# Altium PCB Forehead Module.PcbDoc
Units mm, origin at the board's own origin, x right, y up, seen from the top; angles counter-clockwise.
Board outline 29.5 x 16 mm, 2 copper layers (Top Layer, Bottom Layer), stack 1.671 mm thick; 7 components, 8 nets, 27 pads, 14 vias.
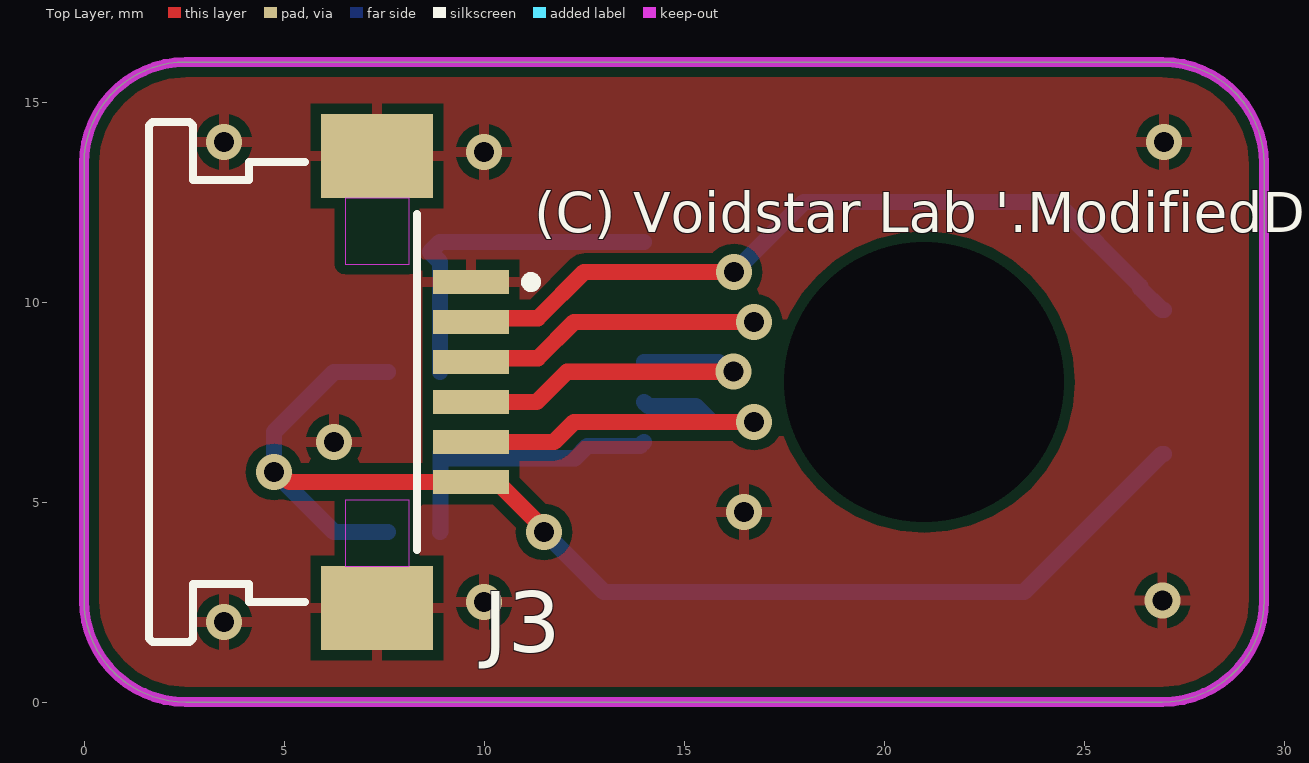
[diagram p0: Top Layer view]
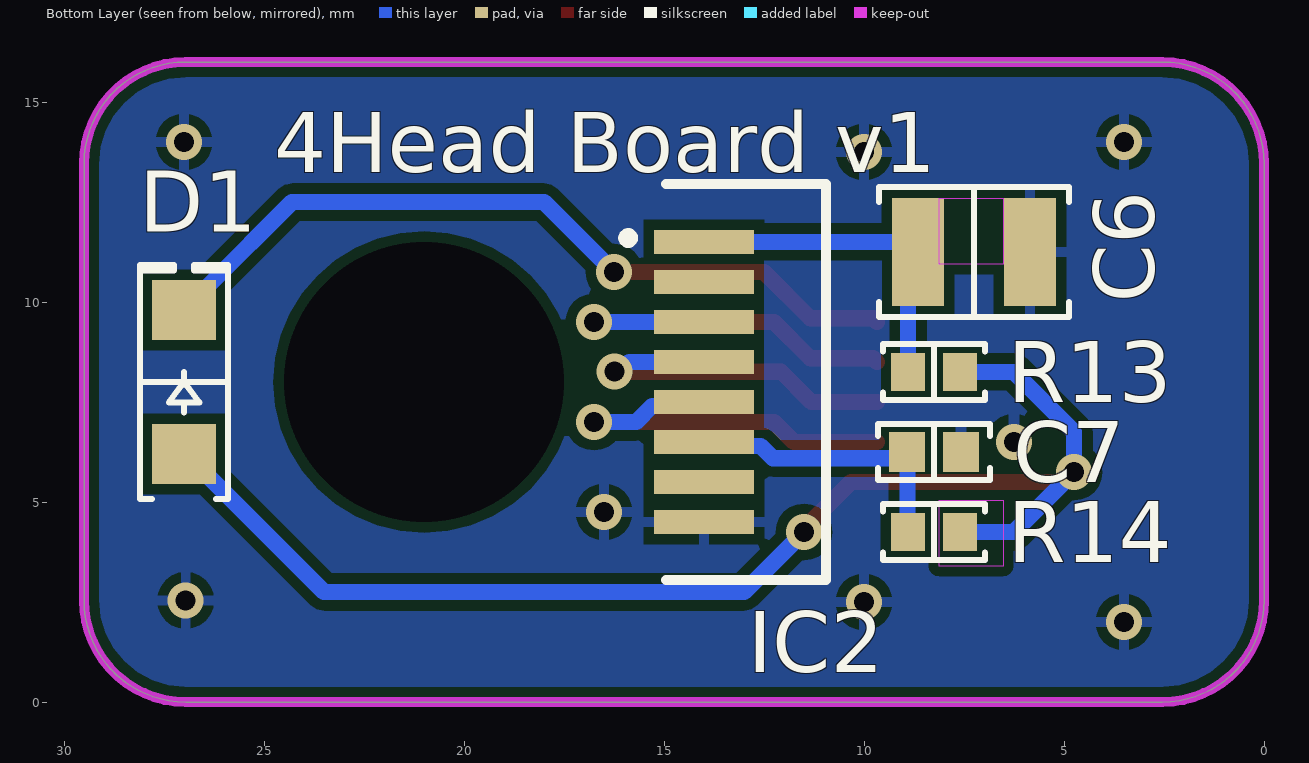
[diagram p1: Bottom Layer view, seen from below]
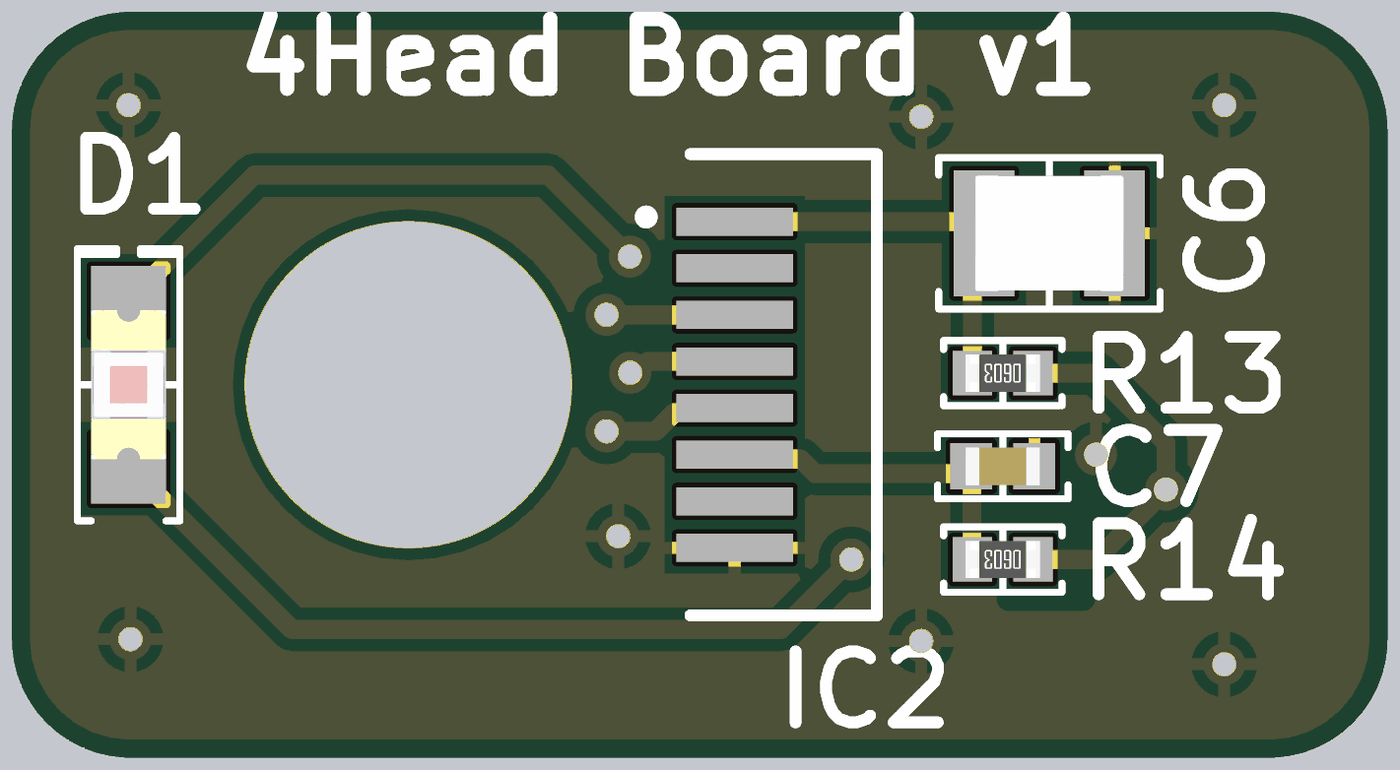
[diagram p2: 3D render of the assembled board from below, using the file's embedded part models]

## Layer stack, top to bottom
Top Solder: solder mask 0.0102, Solder Resist, Dk 3.5
Top Layer: signal copper 0.0356
Dielectric 1: dielectric 1.6, FR-4, Dk 4.8
Bottom Layer: signal copper 0.0356
Bottom Solder: solder mask 0.0102, Solder Resist, Dk 3.5

## Board outline
0,2.54 ccw(c2.54,2.54) 2.54,0 26.96,0 ccw(c26.96,2.54) 29.5,2.54 29.5,13.46 ccw(c26.96,13.46) 26.96,16 2.54,16 ccw(c2.54,13.46) 0,13.46

## Design rules (kind name [scope] priority, off if disabled: settings)
Clearance [All] p1: gap=0.254 ignorepadtopadclearanceinfootprint=FALSE except(0: Arc-Hole Track-Hole SMDPad-Hole THPad-Hole Via-Hole Fill-Hole Poly-Hole Region-Hole Text-Hole)
PolygonConnect [All] p1: connectstyle=Relief reliefconductorwidth=0.254 reliefentries=4 polygonreliefangle="90 Angle" airgapwidth=0.254
RoomDefinition Sheet2 [InComponentClass('Sheet2')] p1: confinementstyle=ConfineIn formatcopy=TRUE lockcomponents=FALSE outline 1,0.5 28.5,0.5 28.5,15.5 1,15.5
RoutingVias [All] p1: holewidth=0.5 width=0.9 viastyle="Through Hole" minholewidth=0.5 minwidth=0.9 maxholewidth=1 maxwidth=1.4
SolderMaskExpansion "Tent Vias" [IsVia] p1: expansion=0.102 istentingtop=TRUE // Tent that shit
SolderMaskExpansion [All] p2: expansion=0.102 istentingtop=FALSE
Width [All] p1: maxlimit=0.813 minlimit=0.254 preferedwidth=0.406 minimp=50.000000 maximp=50.000000 favimp=50.000000
30 further rules are at their usual default settings.

## Classes and differential pairs
component class Sheet2: C6 C7 D1 IC2 R13 R14

## Components (designator, comment, footprint, x,y, rotation, side; value= is the part's Value field where it differs from the comment)
C6 "4.7µF" "CAP 1210_3225 - 2.8MM" 7.25,11.25 r0 bottom
C7 "0.1µF" "CAP 0603_1608" 8.25,6.25 r0 bottom
D1 "Red" "LED 1206_3216 RED" 27,8 r90 bottom
IC2 "TFDU4101-TT3" TFDU4101-TR3 14.95,12.95 r270 bottom
J3 "52271-0679" MOLX-52271-0679 8.5,8 r270 top
R13 "56 Ohms" "RES 0603_1608" 8.25,8.25 r0 bottom
R14 "47 Ohms" "RES 0603_1608" 8.25,4.25 r0 bottom

## Footprints (in the part's own frame and the unit in brackets; to place one, negate y for a bottom-side part, rotate by r counter-clockwise, add the part's x,y. Pads: shape width x height; smd on the part's side, far side on the other; paste and mask are expansions set on the pad)
"CAP 0603_1608" [mm] "Chip Capacitor, 2-Leads, Body 1.60x0.80mm, IPC Medium Density"
  rect 0.9x1 smd: 1(-0.675,0) 2(0.675,0)
  silkscreen extent -1.4,-0.7 1.4,0.7, body extent -0.8,-0.41 0.8,0.41, height 0.82
"CAP 1210_3225 - 2.8MM" [mm] "Chip Capacitor, 2-Leads, Body 3.20x2.50mm, IPC Medium Density"
  rect 1.3x2.7 smd: 1(-1.4,0) 2(1.4,0)
  silkscreen extent -2.38,-1.62 2.37,1.63, body extent -1.6,-1.25 1.6,1.25, height 2.8
"LED 1206_3216 RED" [mm] "Chip Diode, 2-Leads, Body 3.13x1.55mm, IPC Medium Density"
  rect 1.5x1.6 smd: 1(-1.8,0) 2(1.8,0)
  silkscreen extent -2.92,-1.1 2.92,1.1, body extent -1.6,-0.8 1.6,0.8, height 0.9
MOLX-52271-0679 [mm] "FPC Connector, 6-Leads, Right Angle, Pitch 1.0 mm, Mated Height 3.0 mm, SMT"
  rect 0.6x1.9 smd: 1(-2.5,1.175) 2(-1.5,1.175) 3(-0.5,1.175) 4(0.5,1.175) 5(1.5,1.175) 6(2.5,1.175)
  rect 2.1x2.8 smd: MP1(-5.65,-1.175) MP2(5.65,-1.175)
  Keep-Out Layer region: 2.95,-1.975 4.6,-1.975 4.6,-0.375 2.95,-0.375
  Keep-Out Layer region: -4.6,-1.975 -2.95,-1.975 -2.95,-0.375 -4.6,-0.375
  silkscreen extent -6.5,-6.88 6.5,2.8, body extent -6.5,-6.87 6.5,1.83, height 3.01
"RES 0603_1608" [mm] "Chip Resistor, 2-Leads, Body 1.60x0.80mm, IPC Medium Density"
  rect 0.85x0.95 smd: 1(-0.65,0) 2(0.65,0)
  silkscreen extent -1.27,-0.7 1.27,0.7, body extent -0.8,-0.4 0.8,0.4, height 0.45
TFDU4101-TR3 [mm]
  rect 0.6x2.5 smd: 1(1.45,0.95) 2(2.45,0.95) 3(3.45,0.95) 4(4.45,0.95) 5(5.45,0.95) 6(6.45,0.95) 7(7.45,0.95) 8(8.45,0.95)
  silkscreen extent 0,-1.07 9.9,4, body extent 0,0 9.91,3.94, height 4.7

## Part data
C6: library part UMK325B7475KM-T, "CAP CER 4.7UF 50V X7R 1210", Device Package="1210 (3225 Metric)", Manufacturer="Taiyo Yuden", Operating Temperature="-55°C ~ 125°C", Supplier Part Number 1=587-2673-1-ND, Temperature Coefficient=X7R, Tolerance=±10%, Voltage - Rated=50V, Applications="General Purpose", Capacitance=4.7µF, ComponentLink1Description=Datasheet, ComponentLink1URL=https://www.yuden.co.jp/productdata/catalog/mlcc01_e.pdf, ComponentLink2Description="DigiKey Link", ComponentLink2URL=http://digikey.com/product-detail/en/taiyo-yuden/UMK325B7475KM-T/587-2673-1-ND/2417260, LastUpdated="1/21/2020 12:30:50 AM", Lifecycle Status=Active, Minimum Order=1, Mounting Type="Surface Mount, MLCC", Package / Case="1210 (3225 Metric)", Packaging=TapeAndReel, Part Number=UMK325B7475KM-T, Part Status=Active, PartId=23636, Price=0.16, Series=M, Size / Dimension="0.126\" L x 0.098\" W (3.20mm x 2.50mm)", Supplier 1=DigiKey, Thickness (Max)="0.106\" (2.70mm)"
C7: library part C0603C104K5RAC7411, "CAP CER 0.1UF 50V X7R 0603", Device Package="0603 (1608 Metric)", Manufacturer=KEMET, Operating Temperature="-55°C ~ 125°C", Supplier Part Number 1=399-7374-2-ND, Temperature Coefficient=X7R, Tolerance=±10%, Voltage - Rated=50V, Applications="Bypass, Decoupling", Capacitance=0.1µF, ComponentLink1Description=Datasheet, ComponentLink1URL=https://api.kemet.com/component-edge/download/datasheet/C0603C104K5RAC7411.pdf, ComponentLink2Description="DigiKey Link", ComponentLink2URL=http://digikey.com/product-detail/en/kemet/C0603C104K5RAC7411/399-7374-2-ND/3317013, LastUpdated="1/21/2020 12:02:09 AM", Lifecycle Status=Active, Minimum Order=15000, Mounting Type="Surface Mount, MLCC", Package / Case="0603 (1608 Metric)", Packaging=TapeAndReel, Part Number=C0603C104K5RAC7411, Part Status=Active, PartId=2233, Price=0.02, Series="SMD Comm X7R", Size / Dimension="0.063\" L x 0.031\" W (1.60mm x 0.80mm)", Supplier 1=DigiKey, Thickness (Max)="0.035\" (0.90mm)"
D1: library part SML-LX1206IW-TR, "LED RED DIFFUSED 1206 SMD", Current - Test=20mA, Device Package="1206 (3216 Metric)", Lens Color=White, Manufacturer="Lumex Opto/Components Inc.", Millicandela Rating=6mcd, Supplier Device Package=1206, Supplier Part Number 1=67-1003-1-ND, Voltage - Forward (Vf) (Typ)=2V, Color=Red, ComponentLink1Description=Datasheet, ComponentLink1URL=https://www.lumex.com/content/files/ProductAttachment/SML-LX1206IW-TR.pdf, ComponentLink2Description="DigiKey Link", ComponentLink2URL=http://digikey.com/product-detail/en/lumex-opto-components-inc/SML-LX1206IW-TR/67-1003-1-ND/270801, Configuration=Standard, Height (Max)=1.10mm, LastUpdated="1/21/2020 3:14:28 AM", Lens Size="2.00mm x 1.60mm", Lens Style="Rectangle with Flat Top", Lens Transparency=Diffused, Lifecycle Status=Active, Minimum Order=1, Mounting Type="Surface Mount", Package / Case="1206 (3216 Metric)", Packaging=TapeAndReel, Part Number=SML-LX1206IW-TR, Part Status=Active, PartId=192, Price=0.08, Series=-, Size / Dimension="3.20mm L x 1.60mm W", Supplier 1=DigiKey, Viewing Angle=160°, Wavelength - Peak=635nm
IC2: "Integrated Circuit", Manufacturer_Name=Vishay, Mouser Part Number=782-TFDU4101-TT3, Arrow Part Number=TFDU4101-TT3, Arrow Price/Stock=https://www.arrow.com/en/products/tfdu4101-tt3/vishay, Datasheet Link=https://www.vishay.com/docs/81288/tfdu4101.pdf, Manufacturer_Part_Number=TFDU4101-TT3, Mouser Price/Stock=https://www.mouser.com/Search/Refine.aspx?Keyword=782-TFDU4101-TT3
J3: "1.0 mm Pitch Easy-On(TM) Type FPC Connector, 3.0 mm Mated Height, Right Angle, ZIF, SMT, Bottom Contact, 6 Circuits, -40 to 85 degC, ELV and RoHS Compliant, Tape and Reel", Current (Max per Contact)=0.5A, Manufacturer=Molex, Supplier Part Number 1=1079950, Voltage (Max)="50V AC (RMS)/DC", Circuits (Loaded)=6, ComponentLink1Description="Manufacturer URL", ComponentLink1URL=http://www.molex.com/molex/index.jsp, ComponentLink2Description=Datasheet, ComponentLink2URL=http://www.molex.com/webdocs/datasheets/pdf/en-us/0522710679_FFC_FPC_CONNECTORS.pdf, ComponentLink3Description="Package Specification", ComponentLink3URL=http://www.molex.com/pdm_docs/sd/522710679_sd.pdf, Contact Position=Bottom, Durability (mating cycles max)=30, Entry Angle="90degrees Angle", Mated Height=3.00mm, Material - Metal="Phosphor Bronze", Material - Plating Mating=Tin-Bismuth, Material - Plating Termination=Tin-Bismuth, Mounting Technology="Surface Mount", Number of Rows=1, Orientation="Right Angle", PackageDescription="6-Lead FPC Connector, Pitch 1.0 mm", PackageReference=52271-0679, PackageVersion="Rev. B, 04/2004", Packing="Tape and Reel", PartNumber=52271-0679, PCB Locator=No, PCB Retention=Yes, Pitch - Mating Interface=1.00mm, Pitch - Termination Interface=1.00mm, Polarized to PCB=Yes, RoHS=TRUE, Stackable=No, Supplier 1=Farnell, Supplier 2=Newark, Supplier 3=Mouser, Supplier Part Number 2=58J9529, Supplier Part Number 3=538-52271-0679, System=Connector
R13: library part ERJ-PA3F56R0V, "RES SMD 56 OHM 1% 1/4W 0603", Device Package="0603 (1608 Metric)", Manufacturer="Panasonic Electronic Components", Operating Temperature="-55°C ~ 155°C", Power (Watts)="0.25W, 1/4W", Ratings=AEC-Q200, Supplier Device Package=0603, Supplier Part Number 1=P56.00BYCT-ND, Temperature Coefficient=±100ppm/°C, Tolerance=±1%, ComponentLink1Description=Datasheet, ComponentLink1URL=https://industrial.panasonic.com/cdbs/www-data/pdf/RDO0000/AOA0000C331.pdf, ComponentLink2Description="DigiKey Link", ComponentLink2URL=http://digikey.com/product-detail/en/panasonic-electronic-components/ERJ-PA3F56R0V/P56.00BYCT-ND/5036208, Composition="Thick Film", Features="Automotive AEC-Q200, Pulse Withstanding", Height - Seated (Max)="0.022\" (0.55mm)", LastUpdated="1/21/2020 12:20:58 AM", Lifecycle Status=Active, Minimum Order=1, Number of Terminations=2, Package / Case="0603 (1608 Metric)", Packaging=TapeAndReel, Part Number=ERJ-PA3F56R0V, Part Status=Active, PartId=14708, Price=0.02, Resistance="56 Ohms", Series=ERJ, Size / Dimension="0.063\" L x 0.031\" W (1.60mm x 0.80mm)", Supplier 1=DigiKey
R14: library part RCS060347R0FKEA, "RES SMD 47 OHM 1% 1/4W 0603", Device Package="0603 (1608 Metric)", Manufacturer="Vishay Dale", Operating Temperature="-55°C ~ 155°C", Power (Watts)="0.25W, 1/4W", Ratings=AEC-Q200, Supplier Device Package=0603, Supplier Part Number 1=541-10470-1-ND, Temperature Coefficient=±100ppm/°C, Tolerance=±1%, ComponentLink1Description=Datasheet, ComponentLink1URL=http://www.vishay.com/docs/20065/rcse3.pdf, ComponentLink2Description="DigiKey Link", ComponentLink2URL=http://digikey.com/product-detail/en/vishay-dale/RCS060347R0FKEA/541-10470-1-ND/10059836, Composition="Thick Film", Features="Automotive AEC-Q200, Pulse Withstanding", Height - Seated (Max)="0.020\" (0.50mm)", LastUpdated="1/21/2020 12:15:03 AM", Lifecycle Status=Active, Minimum Order=1, Number of Terminations=2, Package / Case="0603 (1608 Metric)", Packaging=TapeAndReel, Part Number=RCS060347R0FKEA, Part Status=Active, PartId=25618, Price=0.02, Resistance="47 Ohms", Series="AccliMate™ RCU", Size / Dimension="0.061\" L x 0.033\" W (1.55mm x 0.85mm)", Supplier 1=DigiKey

## Free pads (board coordinates)
  round 1 hole 7: L(21,8)

## Via types
v1: diameter 0.9, hole 0.5, Top Layer to Bottom Layer, tented both sides, 14 vias

## Nets (pads, with @x,y where several pads share a name; then routed paths per layer and width w, separated by ;. In a path a pad name is that pad's centre, name@x,y a point inside that pad or via, vN(x,y) a via of type N, cw(c..) or ccw(c..) an arc to the next point about the centre after c; other vN are vias at no path point)
GND: C6.1 C7.1 IC2.8 J3.1 J3.MP1 J3.MP2
  other v1: 3.5,2 10,2.5 26.96,2.54 16.5,4.75 6.25,6.5 10,13.75 3.5,14 27,14
IR_XC_EN: IC2.5 J3.5 | length 10.2
  Top Layer w0.406: J3.5 11.75,6.5 12.25,7 v1(16.75,7)
  Bottom Layer w0.406: IC2.5 14.097,7.403 15.293,7.403 15.697,7 v1(16.75,7)
LED_REC: D1.2 J3.2 | length 19.7
  Top Layer w0.406: J3.2 9.772,9.597 11.347,9.597 12.5,10.75 v1(16.25,10.75)
  Bottom Layer w0.406: v1(16.25,10.75) 18,12.5 24.3,12.5 26.403,10.397 26.403,10.347 26.95,9.8 D1.2
NetC6_2: C6.2 IC2.1 R13.2 | length 8.6
  Bottom Layer w0.406: R13.2 8.9,11 C6.2 8.9,11.5 IC2.1
NetC7_2: C7.2 IC2.6 R14.2 | length 7.3
  Bottom Layer w0.406: R14.2 8.912,4.263 8.912,6.237 C7.2 9.082,6.093 12.277,6.093 12.587,6.403 13.903,6.403 IC2.6
RX_IR: IC2.4 J3.4 | length 9.2
  Top Layer w0.406: J3.4 11.316,7.5 12.073,8.257 v1(16.243,8.257)
  Bottom Layer w0.406: IC2.4 15.866,8.5 16.109,8.257 v1(16.243,8.257)
TX_IR: IC2.3 J3.3 | length 10.2
  Top Layer w0.406: J3.3 9.772,8.597 11.347,8.597 12.25,9.5 v1(16.75,9.5)
  Bottom Layer w0.406: IC2.3 v1(16.75,9.5)
VCC: D1.1 J3.6 R13.1 R14.1 | length 32.9
  Top Layer w0.406: v1(4.75,5.75) 4.884,5.75 5.134,5.5 10.325,5.5 11.5,4.325 v1(11.5,4.25)
  Bottom Layer w0.406: R14.1 6.25,4.25 v1(4.75,5.75) 4.75,6.75 5.25,7.25 6.25,8.25 R13.1 ; v1(11.5,4.25) 13,2.75 23.5,2.75 26.95,6.2 D1.1
pads on no net: IC2.2 IC2.7

## Polygon pours and split planes (outlines as drawn)
GND on Bottom Layer "BOTTOM GND" (solid, pour order 1): 2.54,0 cw(c2.54,2.54) 0,2.54 0,13.46 cw(c2.54,13.46) 2.54,16 26.96,16 cw(c26.96,13.46) 29.5,13.46 29.5,2.54 cw(c26.96,2.54) 26.96,0
GND on Top Layer "TOP GND" (solid, pour order 0): 2.54,0 cw(c2.54,2.54) 0,2.54 0,13.46 cw(c2.54,13.46) 2.54,16 26.96,16 cw(c26.96,13.46) 29.5,13.46 29.5,2.54 cw(c26.96,2.54) 26.96,0

## Keep-outs
Keep-Out Layer:
  the board outline again, w0.25

## Silkscreen, mask and mechanical layers (free items; w line width, h text height)
Top Overlay:
  text "(C) Voidstar Lab '.ModifiedDate'" at 11.25,11.75 h1
Bottom Overlay:
  text "4Head Board v1" at 24.75,13.25 h1.5
Mechanical 1:
  lines w0.254: 13.5,3.5 13.5,12.5 25.5,12.5 25.5,3.5 13.5,3.5